# EAGLE board board_rev3 (EAGLE 4.16)
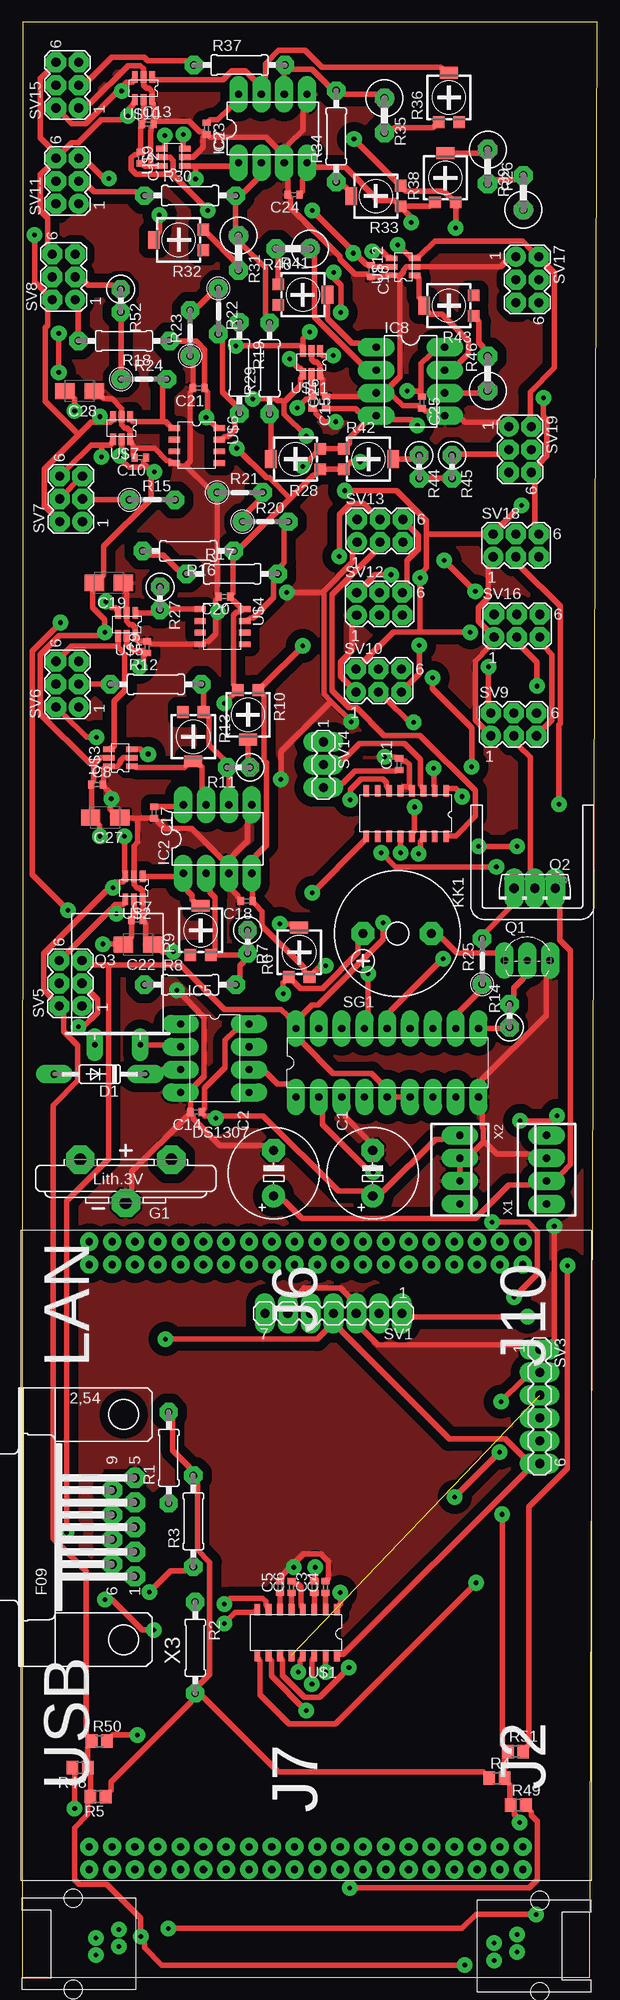
[diagram p0: board, top side]
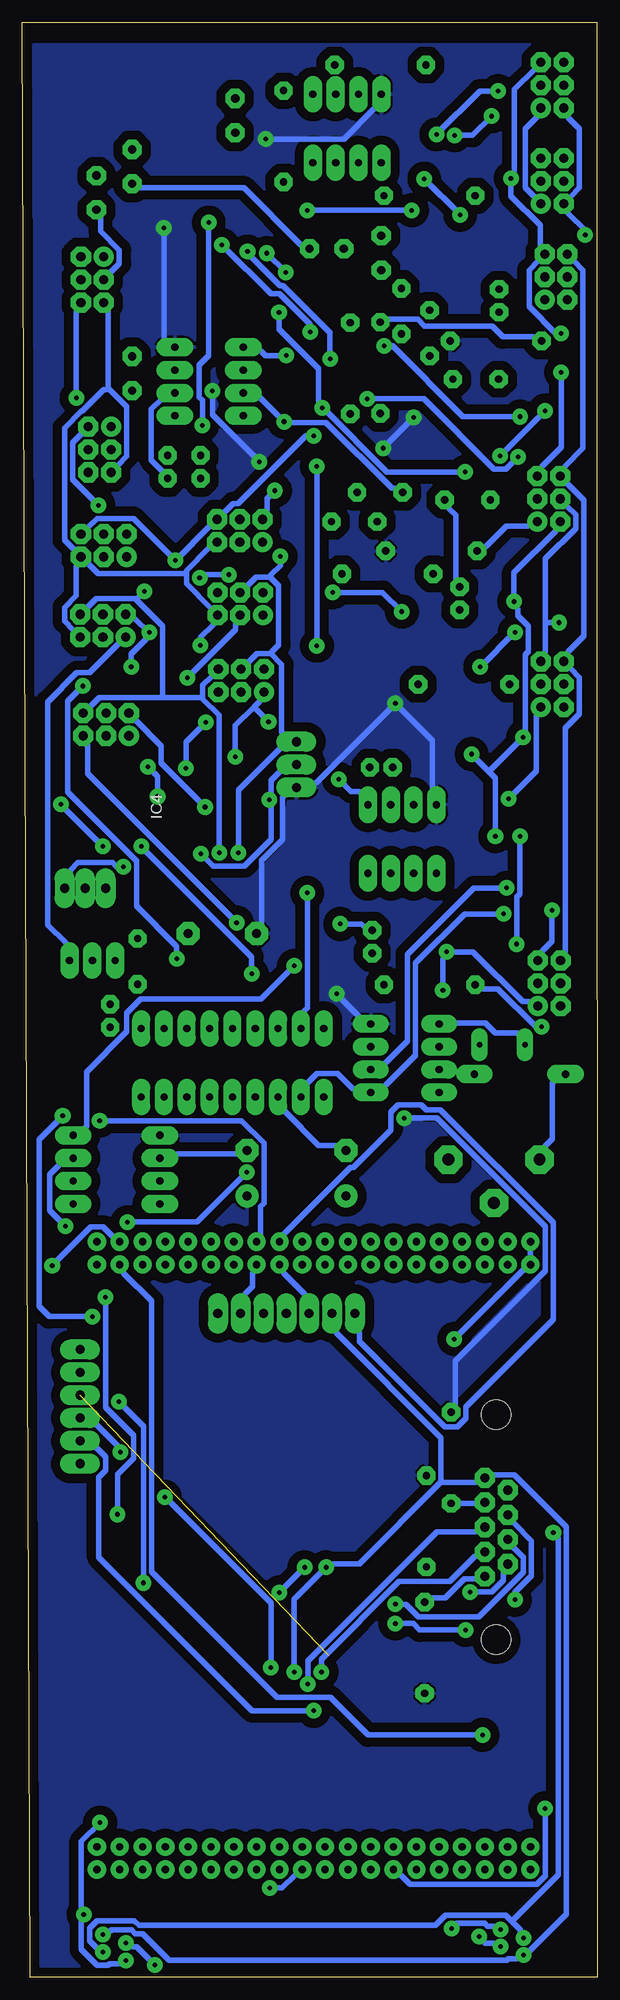
[diagram p1: board, bottom side, seen from below]

Size 63.99 x 217.45 mm. Coordinates in mm from the lower left corner, seen from the top.
Outline: 0,0 63.12,0 63.99,217.45 0.05,217.45 0,0
Copper layers (1*16): Top 0.035mm / dielectric 1.5mm / Bottom 0.035mm
Design rules "mio2": minimum track width 20mil, minimum drill 20mil, track to track 40mil, track to pad 40mil, pad to pad 40mil, via to via 40mil, smd to smd 40mil, copper to edge 40mil, drill to drill 8mil, minimum pad ring 24mil, minimum via ring 24mil, stop-mask expansion 4mil, vias tented up to drill 0mil, thermal gap 10mil
Net classes: 0 default: width 0.61 mm
tKeepout: area 26.5,90.6 to 29.4,93.5; area 26.5,85.4 to 29.4,88.2; area 37.5,90.6 to 40.4,93.5; area 37.5,85.4 to 40.4,88.2
tRestrict: area 9.1,43.5 to 13.5,56.5; area 25.3,36.2 to 35.5,40.2; area 6.2,0.4 to 12.3,6.9; area 50.1,0 to 57,6.1

## Footprints (pad centres in the part's own frame; a part is rotated, then mirrored left to right if it is on the bottom)
E5-10,5 = drill 1.016 pad 2.54 round: + -2.54,0 | drill 1.016 pad 2.54 octagon: - 2.54,0
C0402 = smd 0.7 x 0.9: 1 -0.65,0; 2 0.65,0
B/3528-21W = smd 2.15 x 1.8: + 1.625,0; - -1.625,0
DO35-10 = drill 0.813 long: A 5.08,0; C -5.08,0
CR2032V = drill 1.321 pad 3.15 octagon: + -2.54,-5.08; +@1 -2.54,5.08; - 2.286,0
FOX = drill 0.8 pad 1.93 round: J6.1 67.31,0; J6.2 69.85,0; J6.3 67.31,-2.54; J6.4 69.85,-2.54; J6.5 67.31,-5.08; J6.6 69.85,-5.08; J6.7 67.31,-7.62; J6.8 69.85,-7.62; J6.9 67.31,-10.16; J6.10 69.85,-10.16; J6.11 67.31,-12.7; J6.12 69.85,-12.7; J6.13 67.31,-15.24; J6.14 69.85,-15.24; J6.15 67.31,-17.78; J6.16 69.85,-17.78; J6.17 67.31,-20.32; J6.18 69.85,-20.32; J6.19 67.31,-22.86; J6.20 69.85,-22.86; J6.21 67.31,-25.4; J6.22 69.85,-25.4; J6.23 67.31,-27.94; J6.24 69.85,-27.94; J6.25 67.31,-30.48; J6.26 69.85,-30.48; J6.27 67.31,-33.02; J6.28 69.85,-33.02; J6.29 67.31,-35.56; J6.30 69.85,-35.56; J6.31 67.31,-38.1; J6.32 69.85,-38.1; J6.33 67.31,-40.64; J6.34 69.85,-40.64; J6.35 67.31,-43.18; J6.36 69.85,-43.18; J6.37 67.31,-45.72; J6.38 69.85,-45.72; J6.39 67.31,-48.26; J6.40 69.85,-48.26; J7.1 0,0; J7.2 2.54,0; J7.3 0,-2.54; J7.4 2.54,-2.54; J7.5 0,-5.08; J7.6 2.54,-5.08; J7.7 0,-7.62; J7.8 2.54,-7.62; J7.9 0,-10.16; J7.10 2.54,-10.16; J7.11 0,-12.7; J7.12 2.54,-12.7; J7.13 0,-15.24; J7.14 2.54,-15.24; J7.15 0,-17.78; J7.16 2.54,-17.78; J7.17 0,-20.32; J7.18 2.54,-20.32; J7.19 0,-22.86; J7.20 2.54,-22.86; J7.21 0,-25.4; J7.22 2.54,-25.4; J7.23 0,-27.94; J7.24 2.54,-27.94; J7.25 0,-30.48; J7.26 2.54,-30.48; J7.27 0,-33.02; J7.28 2.54,-33.02; J7.29 0,-35.56; J7.30 2.54,-35.56; J7.31 0,-38.1; J7.32 2.54,-38.1; J7.33 0,-40.64; J7.34 2.54,-40.64; J7.35 0,-43.18; J7.36 2.54,-43.18; J7.37 0,-45.72; J7.38 2.54,-45.72; J7.39 0,-48.26; J7.40 2.54,-48.26
DIL08 = drill 0.813 long: 1 -3.81,-3.81; 2 -1.27,-3.81; 3 1.27,-3.81; 4 3.81,-3.81; 5 3.81,3.81; 6 1.27,3.81; 7 -1.27,3.81; 8 -3.81,3.81
ADT7318SMD = smd 0.635 x 1.27: 1 -10.16,-1.27; 2 -8.89,-1.27; 3 -7.62,-1.27; 4 -6.35,-1.27; 5 -5.08,-1.27; 6 -3.81,-1.27; 7 -2.54,-1.27; 8 -1.27,-1.27; 9 -1.27,3.81; 10 -2.54,3.81; 11 -3.81,3.81; 12 -5.08,3.81; 13 -6.35,3.81; 14 -7.62,3.81; 15 -8.89,3.81; 16 -10.16,3.81
DS1307 = drill 0.8 long: 1 -8.89,-5.08; 2 -6.35,-5.08; 3 -3.81,-5.08; 4 -1.27,-5.08; 5 -1.27,2.54; 6 -3.81,2.54; 7 -6.35,2.54; 8 -8.89,2.54
TO92-EBC = drill 0.813 long: B 0,-1.27; C -2.54,-1.27; E 2.54,-1.27
TO126AV = drill 1.016 long: B 2.286,-1.27; C 0,-1.27; E -2.286,-1.27
Q = drill 0.61 long: 1 -2.54,-7.62; 2 2.54,-7.62
0207/10 = drill 0.813 octagon: 1 -5.08,0; 2 5.08,0
R0805 = smd 1.3 x 1.5: 1 -0.85,0; 2 0.85,0
RTRIM4G/J = smd 1.3 x 1.3: 1 -1.15,-2.75; 3 1.15,-2.75 | smd 2 x 1.3: 2 0,2.75
0309V = drill 0.813 octagon: 1 -1.27,0; 2 1.27,0
0207/5V = drill 0.813 octagon: 1 -2.54,0; 2 2.54,0
0411V = drill 0.914 octagon: 1 -2.54,0; 2 1.27,0
F/CM12P = drill 1.016 pad 2.54 octagon: + 3.81,0; - -3.81,0
MA07-1 = drill 1.016 long: 1 -7.62,0; 2 -5.08,0; 3 -2.54,0; 4 0,0; 5 2.54,0; 6 5.08,0; 7 7.62,0
MA06-1 = drill 1.016 long: 1 -6.35,0; 2 -3.81,0; 3 -1.27,0; 4 1.27,0; 5 3.81,0; 6 6.35,0
MA03-2 = drill 1.016 round: 1 -2.54,-1.27 | drill 1.016 octagon: 2 -2.54,1.27; 3 0,-1.27; 4 0,1.27; 5 2.54,-1.27; 6 2.54,1.27
MA03-1 = drill 1.016 long: 1 -2.54,0; 2 0,0; 3 2.54,0
MAX3232 = smd 0.635 x 1.27: 1 0,-2.54; 2 1.27,-2.54; 3 2.54,-2.54; 4 3.81,-2.54; 5 5.08,-2.54; 6 6.35,-2.54; 7 7.62,-2.54; 8 8.89,-2.54; 9 8.89,2.54; 10 7.62,2.54; 11 6.35,2.54; 12 5.08,2.54; 13 3.81,2.54; 14 2.54,2.54; 15 1.27,2.54; 16 0,2.54
MCP3421 = smd 0.635 x 1.27: 1 -0.953,-1.27; 2 0,-1.27; 3 0.953,-1.27; 4 0.953,1.27; 5 0,1.27; 6 -0.953,1.27
MAX6032 = smd 0.66 x 1.27: P$1 0.3,0.6; P$2 1.6,0.6; P$3 2.9,0.6; P$4 4.2,0.6; P$5 4.2,5.57; P$6 2.9,5.57; P$7 1.6,5.57; P$8 0.3,5.57
MCP23008_DHT = drill 0.8 long: P$1 0,0; P$2 2.54,0; P$3 5.08,0; P$4 7.62,0; P$5 10.16,0; P$6 12.7,0; P$7 15.24,0; P$8 17.78,0; P$9 20.32,0; P$10 20.32,7.62; P$11 17.78,7.62; P$12 15.24,7.62; P$13 12.7,7.62; P$14 10.16,7.62; P$15 7.62,7.62; P$16 5.08,7.62; P$17 2.54,7.62; P$18 0,7.62
J-I2C = drill 0.5 pad 1.27 round: 1 -2.54,-0.635; 2 0,0.318; 3 -2.54,1.27; 4 0,2.223
22-23-2041 = drill 0.813 long: 1 -3.81,0; 2 -1.27,0; 3 1.27,0; 4 3.81,0
F09H = drill 1.016 octagon: 1 -5.486,-1.27; 2 -2.743,-1.27; 3 0,-1.27; 4 2.743,-1.27; 5 5.486,-1.27; 6 -4.115,1.27; 7 -1.372,1.27; 8 1.372,1.27; 9 4.115,1.27 | hole 3.302: -12.522,0; 12.522,0

## Placement (x,y rotation side)
C1  470uF  [E5-10,5]  38.98,89.42 90 top
C2  470uF  [E5-10,5]  27.96,89.42 90 top
C3  100nF  [C0402]  32.48,43.4 90 top
C4  100nF  [C0402]  33.75,43.4 90 top
C5  100nF  [C0402]  28.67,43.4 90 top
C6  100nF  [C0402]  29.94,43.4 90 top
C7  100nF  [C0402]  12.77,117.61 0 top
C8  100nF  [C0402]  8.3,132.65 0 top
C9  100nF  [C0402]  13.89,147.94 90 top
C10  100nF  [C0402]  13.13,169.02 180 top
C11  100nF  [C0402]  41.93,134.94 90 top
C12  100nF  [C0402]  13.18,202.4 270 top
C13  100nF  [C0402]  13.94,206.11 0 top
C14  100nF  [C0402]  19.32,96.23 180 top
C15  100nF  [C0402]  32.28,175.17 270 top
C16  100nF  [C0402]  38.78,189.8 270 top
C17  100nF  [C0402]  14.65,129.55 270 top
C18  100nF  [C0402]  24.96,119.7 180 top
C19  [B/3528-21W]  9.62,155.11 180 top
C20  100nF  [C0402]  22.47,153.58 180 top
C21  100nF  [C0402]  19.63,176.75 180 top
C22  [B/3528-21W]  12.87,114.87 180 top
C23  100nF  [C0402]  20.49,205.65 270 top
C24  100nF  [C0402]  30.2,198.29 180 top
C25  100nF  [C0402]  44.47,175.17 270 top
C26  100nF  [C0402]  33.8,175.17 90 top
C27  [B/3528-21W]  9.22,128.99 180 top
C28  [B/3528-21W]  6.37,176.44 180 top
D1  1N4148  [DO35-10]  8.61,100.44 180 top
G1  CR2032V  [CR2032V]  11.5,88.4 270 top
IC1  FOX  [FOX]  7.44,11.95 90 top
IC2  MAX412CPA  [DIL08]  21.71,126.61 0 top
IC4  ADT7316SMD  [ADT7318SMD]  37,130.72 180 top
IC5  DS1307  [DS1307]  22.68,97.14 270 top
IC7  MAX412CPA  [DIL08]  27.86,205.65 0 top
IC8  MAX412CPA  [DIL08]  43.2,177.51 270 top
KK1  D01S  [D01S]  56.76,118.94 0 top
Q1  BC548  [TO92-EBC]  56.21,114.36 0 top
Q2  BD438  [TO126AV]  57.02,119.85 180 top
Q3  32,768Khz  [Q]  10.59,111.32 0 top
R1  2k2  [0207/10]  16.28,57.77 90 top
R2  2k2  [0207/10]  19.22,36.64 270 top
R3  2k2  [0207/10]  19.02,50.71 90 top
R4  [R0805]  52.8,22.11 0 top
R5  [R0805]  8.4,20.08 180 top
R6  [RTRIM4G/J]  30.81,114.01 0 top
R7  [0309V]  25.06,115.18 270 top
R8  [0207/10]  18.66,110.4 0 top
R9  [RTRIM4G/J]  19.83,116.45 0 top
R10  [RTRIM4G/J]  25.12,140.42 180 top
R11  [0309V]  24.05,134.58 180 top
R12  [0207/10]  14.85,143.83 0 top
R13  [RTRIM4G/J]  19.02,137.99 180 top
R14  [0309V]  54.22,106.95 90 top
R15  [0207/5V]  14.45,164.35 0 top
R16  5k 1%  [0207/10]  18.46,158.66 180 top
R17  2k2  [0207/10]  23.34,156.12 0 top
R18  5k 1%  [0207/10]  11.3,182.03 180 top
R19  100k 1%  [0207/10]  24.15,179.03 270 top
R20  [0207/5V]  27.05,161.91 0 top
R21  [0207/5V]  24.2,165.16 0 top
R22  [0207/5V]  21.81,185.33 270 top
R23  [0207/5V]  18.66,182.89 90 top
R24  [0207/5V]  13.53,177.76 0 top
R25  [0207/5V]  51.18,112.99 90 top
R26  10k  [0411V]  55.75,199.15 90 top
R27  [0309V]  15.31,153.38 270 top
R28  [RTRIM4G/J]  30.4,168.87 90 top
R29  10k  [0207/10]  27.5,178.98 90 top
R30  10k  [0207/10]  18.66,198.18 0 top
R31  10k  [0411V]  24.05,191.17 270 top
R32  [RTRIM4G/J]  17.39,193.26 90 top
R33  [RTRIM4G/J]  39.34,198.13 90 top
R34  10k  [0207/10]  34.92,204.79 90 top
R35  10k  [0411V]  40.3,206.46 270 top
R36  [RTRIM4G/J]  47.47,209.11 0 top
R37  10k  [0207/10]  24.15,212.71 0 top
R38  [RTRIM4G/J]  47.06,200.16 0 top
R39  10k  [0411V]  51.79,200.77 270 top
R40  10k  [0411V]  29.48,192.29 180 top
R41  [RTRIM4G/J]  31.21,187.16 270 top
R42  [RTRIM4G/J]  38.53,168.87 270 top
R43  [RTRIM4G/J]  47.47,185.94 90 top
R44  [0309V]  44.17,168.01 270 top
R45  [0309V]  47.82,168.01 270 top
R46  10k  [0411V]  51.79,179.03 90 top
R48  [R0805]  6.42,23.28 180 top
R49  [R0805]  55.19,19.11 0 top
R50  [R0805]  8.55,26.23 0 top
R51  [R0805]  54.88,25.11 0 top
R52  [0309V]  10.94,186.5 270 top
SG1  F/CM12P  [F/CM12P]  41.73,116.09 180 top
SV1  [MA07-1]  34.62,73.83 180 top
SV3  [MA06-1]  57.58,63.46 270 top
SV5  [MA03-2]  5.35,110.55 90 top
SV6  [MA03-2]  5,143.83 90 top
SV7  [MA03-2]  5.41,164.45 90 top
SV8  [MA03-2]  4.59,189.14 90 top
SV9  [MA03-2]  54.68,139.36 0 top
SV10  [MA03-2]  39.64,144.23 0 top
SV11  [MA03-2]  5,199.81 90 top
SV12  [MA03-2]  39.75,152.77 0 top
SV13  [MA03-2]  39.8,160.9 0 top
SV14  [MA03-1]  33.5,134.89 270 top
SV15  [MA03-2]  5,210.48 90 top
SV16  [MA03-2]  55.04,150.33 0 top
SV17  [MA03-2]  56.21,188.84 270 top
SV18  [MA03-2]  54.94,159.27 0 top
SV19  [MA03-2]  55.39,169.94 270 top
U$1  MAX3232  [MAX3232]  35.02,38.32 180 top
U$2  MCP3421  [MCP3421]  12.42,121.17 180 top
U$3  MCP3421  [MCP3421]  10.89,135.65 90 top
U$4  MAX6032  [MAX6032]  19.17,152.46 270 top
U$5  MCP3421  [MCP3421]  11.6,150.48 180 top
U$6  MAX6032  [MAX6032]  16.33,172.63 270 top
U$7  MCP3421  [MCP3421]  11.04,172.33 180 top
U$8  MCP23008_DHT  [MCP23008_DHT]  30.45,97.9 0 top
U$9  MCP3421  [MCP3421]  16.78,202.45 90 top
U$10  MCP3421  [MCP3421]  13.48,210.12 180 top
U$11  MCP3421  [MCP3421]  32.18,179.64 180 top
U$12  MCP3421  [MCP3421]  42.39,190.26 90 top
U$13  J-I2C  [J-I2C]  52.5,4.08 180 top
U$14  J-I2C  [J-I2C]  10.74,3.06 0 top
X1  22-23-2041  [22-23-2041]  58.34,89.83 90 top
X2  22-23-2041  [22-23-2041]  48.69,89.83 270 top
X3  [F09H]  11.25,50.05 90 top

## Library data of the parts
C1-C28 R1-R46 R48-R52 = rcl
D1 = diode
G1 = battery
IC1 IC4 IC5 U$1-U$14 = aggiunte
IC2 IC7 IC8 = maxim
KK1 = heatsink
Q1 = transistor-npn
Q2 = transistor-power
Q3 = special
SG1 = buzzer
SV1 SV3 SV5-SV19 = con-lstb
X1 X2 = con-molex
X3 = con-subd

## Nets
5V: SV5.5 SV6.5 SV7.4 SV7.5 SV8.5 SV9.5 SV10.5 SV11.5 SV12.5 SV13.5 SV15.5 SV16.5 SV17.5 SV18.5 SV19.5 U$8.P$5 U$8.P$6 U$8.P$18 U$13.3 U$14.3
+3V3: IC1.J6.1 IC1.J6.2 SV1.4 SV3.6 U$1.16
+5V: C1.+ C11.1 C14.1 C17.1 C20.1 C21.1 C23.1 C25.1 IC2.8 IC5.8 IC7.8 IC8.8 R1.2 R2.2 R3.2 R4.1 R5.1 R6.1 R10.3 R16.1 R18.1 R28.1 R33.3 R38.3 R42.3 SG1.+ SV14.3 U$4.P$8 U$6.P$8 X2.1
+12V: C2.+ Q2.E SV10.4 SV12.4 SV13.4 SV14.1 X1.2
CH0: IC8.7 R43.2 U$12.1
CH1: IC8.1 R41.2 U$11.1
CH2: IC7.7 R36.2 U$10.1
CH3: IC7.1 R32.2 U$9.1
GND: C1.- C2.- C4.2 C5.2 C7.2 C8.2 C9.2 C10.2 C11.2 C12.2 C13.2 C14.2 C15.2 C16.2 C17.2 C18.2 C19.- C20.2 C21.2 C22.- C23.2 C24.2 C25.2 C26.2 C27.- C28.- G1.- IC2.3 IC2.5 IC4.4 IC4.5 IC5.4 IC7.3 IC7.5 IC8.3 IC8.5 Q1.E R21.1 R23.1 SV1.3 SV1.6 SV3.1 SV5.1 SV6.1 SV9.1 SV10.1 SV11.1 SV12.1 SV13.1 SV15.1 SV16.1 SV17.1 SV18.1 SV19.1 U$1.15 U$2.2 U$2.6 U$3.2 U$3.6 U$4.P$4 U$5.2 U$5.6 U$6.P$4 U$7.2 U$7.6 U$8.P$3 U$8.P$9 U$9.2 U$9.6 U$10.2 U$10.6 U$11.2 U$11.6 U$12.2 U$12.6 U$13.1 U$14.1 X1.3 X2.2 X2.3 X3.5
N$1: R14.1 U$8.P$10
N$2: R17.2 R20.2 U$4.P$7
N$3: R19.2 R22.2 U$6.P$7
N$4: D1.C IC5.3
N$5: R24.1 R52.2
N$6: R15.2 R27.1
N$7: SV8.4
N$8: R20.1 R21.2
N$9: IC2.1 R9.2 U$2.1
N$10: IC2.7 R13.2 U$3.1
N$11: SV18.3 U$8.P$15
N$12: D1.A G1.+
N$13: R27.2 U$4.P$1 U$5.1
N$14: Q2.B R25.2
N$15: IC1.J7.13 R48.2
N$16: R25.1 U$8.P$11
N$17: IC4.16 SV13.3
N$18: SV16.3 U$8.P$14
N$19: Q2.C SV9.3
N$20: Q1.C SG1.-
N$21: IC4.3 IC4.6 IC4.14 SV14.2
N$22: R24.2 U$6.P$1 U$7.1
N$23: IC4.2 SV10.3
N$25: IC4.9 U$8.P$17
N$26: Q1.B R14.2
N$27: C3.2 U$1.1
N$28: R18.2 R19.1 SV8.1
N$29: R16.2 R17.1 SV7.1
N$30: R35.2 R36.1
N$31: R10.2 R11.1
N$33: R40.2 R41.1
N$34: R43.1 R46.2
N$35: R31.2 R32.3
N$36: U$1.14 X3.3
N$37: R15.1 SV7.3
N$38: R52.1 SV8.3
N$39: C6.2 U$1.4
N$40: U$1.13 X3.2
N$41: C5.1 U$1.6
N$42: C3.1 U$1.3
N$43: C4.1 U$1.2
N$44: C6.1 U$1.5
N$45: U$1.8 X3.8
N$46: U$1.7 X3.7
N$47: R2.1 X3.1
N$48: R1.1 X3.4
N$49: R3.1 X3.6
N$50: IC4.1 SV12.3
N$53: IC1.J7.21 R49.2
N$54: IC1.J6.38 R51.2
N$55: SV3.4 U$1.11
N$56: SV3.3 U$1.12
N$57: SV3.5 U$1.10
N$58: IC2.2 R7.2 R8.2 R9.3
N$59: SV3.2 U$1.9
N$60: R8.1 SV5.3
N$61: IC1.J6.37 R50.2
N$62: R6.2 R7.1
N$63: IC2.6 R11.2 R12.2 R13.1
N$66: R22.1 R23.2
N$69: R12.1 SV6.3
N$83: IC5.1 Q3.1
N$84: IC5.2 Q3.2
N$113: IC7.2 R29.2 R30.2 R31.1
N$114: IC7.6 R34.2 R35.1 R37.2
N$115: IC8.2 R26.2 R39.2 R40.1
N$116: IC8.6 R44.2 R45.2 R46.1
N$117: R45.1 SV19.3
N$119: R26.1 SV17.3
N$121: R42.2 R44.1
N$122: R38.2 R39.1
N$123: R33.2 R34.1
N$124: R37.1 SV15.3
N$125: R30.1 SV11.3
N$126: R28.2 R29.1
SCL: IC4.13 IC5.6 R5.2 R48.1 R50.1 SV5.2 SV6.2 SV7.2 SV8.2 SV9.2 SV10.2 SV11.2 SV12.2 SV13.2 SV15.2 SV16.2 SV17.2 SV18.2 SV19.2 U$2.3 U$3.3 U$5.3 U$7.3 U$8.P$1 U$9.3 U$10.3 U$11.3 U$12.3 U$13.2 U$14.2
SD1: IC1.J6.26 SV1.1
SD2: IC1.J6.25 SV1.2
SD5: IC1.J6.23 SV1.5
SD7: IC1.J6.24 SV1.7
SDA: IC4.12 IC5.5 R4.2 R49.1 R51.1 SV5.6 SV6.6 SV7.6 SV8.6 SV9.6 SV10.6 SV11.6 SV12.6 SV13.6 SV15.6 SV16.6 SV17.6 SV18.6 SV19.6 U$2.4 U$3.4 U$5.4 U$7.4 U$8.P$2 U$9.4 U$10.4 U$11.4 U$12.4 U$13.4 U$14.4
V-: C18.1 C24.1 C26.1 IC2.4 IC7.4 IC8.4 R6.3 R10.1 R28.3 R33.1 R38.1 R42.1 X1.4
VCC: C7.1 C8.1 C9.1 C10.1 C12.1 C13.1 C15.1 C16.1 C19.+ C22.+ C27.+ C28.+ U$2.5 U$3.5 U$5.5 U$7.5 U$9.5 U$10.5 U$11.5 U$12.5

## Tracks (layer width: path | path; a pad name or v marks a point on that pad's centre or on a via)
5V  (via drill 0.51)
  Top 0.61: v9.62,200.11 9.06,200.11 7.34,201.84 SV11.5 | SV7.5 5.86,166.23 4.9,165.26 SV7.4 | v4.03,178.52 v4.03,182.84 | v44.17,148.15 44.17,145 42.95,143.78 SV10.5 | SV9.5 57.98,138.9 58.95,139.86 58.95,147.13 58.09,147.99 SV16.5 | U$8.P$18 31.21,103.9 34.56,100.55 38.83,100.55 39.85,99.53 U$8.P$5 U$8.P$6 | 9.57,112.59 17.6,112.59 22.53,107.66 28.77,107.66 29.48,106.95 U$8.P$18 | 9.57,112.59 7.69,112.59 SV5.5 | v4.9,49.44 4.9,86.32 9.57,91 9.57,112.59 | v40.15,117.31 40.15,115.43 32.89,108.17 32.23,108.17 31.21,107.15 U$8.P$18 | v4.24,150.69 1.09,147.54 1.09,122.64 v5.05,118.68
  Bottom 0.61: SV15.5 7.03,212.2 9.22,210.02 9.22,200.93 v9.62,200.11 9.62,198.13 6.37,194.88 6.37,192.75 SV8.5 6.62,190.87 7.59,189.9 7.59,185.84 4.59,182.84 v4.03,182.84 | 5.76,150.69 5.76,157.8 2.41,161.15 2.41,162.67 3.37,163.64 SV7.4 | 5.76,150.69 5.76,147.43 SV6.5 | v4.03,178.52 4.03,170.19 6.17,168.06 SV7.5 | 54.43,176.75 52.4,174.71 52.4,169.18 53.36,168.21 SV19.5 | 54.43,176.75 54.43,185.23 SV17.5 | v44.17,148.15 44.17,149.06 42.79,150.43 SV12.5 43.05,152.31 45.74,155 45.74,156.12 | 45.74,156.12 45.74,156.48 43.25,158.97 SV13.5 | SV18.5 57.98,156.93 57.98,153.68 59.3,152.36 59.3,150.84 58.34,149.87 SV16.5 | 45.74,156.12 55.55,156.12 56.66,157.24 SV18.5 | 54.43,176.75 54.68,176.59 54.94,176.59 57.32,174.21 57.42,174.21 59.3,172.33 59.3,159.88 58.24,158.81 SV18.5 | 9.52,6.21 10.18,6.87 16.89,6.87 18,5.75 51.02,5.75 51.53,6.26 55.65,6.26 56.51,5.4 56.51,4.03 55.75,3.26 U$13.3 | 9.52,6.21 8.56,5.24 8.56,5.14 U$14.3 | v4.9,49.44 4.34,48.88 4.34,11.39 9.52,6.21 | v40.15,117.31 56.71,133.87 56.71,137.02 SV9.5 | v5.05,118.68 5.05,115.23 6.12,114.16 SV5.5 | v4.24,150.69 5.76,150.69
+3V3  (via drill 0.51)
  Top 0.61: U$1.16 35.33,35.88 35.68,35.88 55.9,56.1 SV3.6 55.7,57.92 53.77,59.85 47.52,59.85 35.43,71.95 SV1.4 33.8,71.95 32.84,70.98 v15.92,70.98
  Bottom 0.61: IC1.J6.2 IC1.J6.1 8.25,78.65 v15.92,70.98
+5V  (via drill 0.51)
  Top 0.61: R1.2 16.73,61.89 16.73,58.58 18.56,56.76 R3.2 19.48,54.83 19.48,47.51 20.85,46.14 20.85,33.69 19.68,32.52 R2.2 | R5.1 9.88,20.79 9.88,21.7 18.77,30.59 R2.2 | R4.1 51.33,22.82 28.47,22.82 20.19,31.1 R2.2 | X2.1 46.71,93.18 45.94,93.18 40.2,87.44 C1.+ 37.77,87.44 35.17,87.44 26.79,95.82 21.51,95.82 | IC5.8 23.59,105.27 22.58,104.25 22.58,101.21 20.29,98.92 20.29,96.63 C14.1 20.29,95.82 21.51,95.82 | v29.03,109.38 29.03,110.65 R6.1 30.3,110.65 30.96,109.99 33.4,109.99 37.36,113.96 37.36,114.87 SG1.+ | C23.1 20.9,206.62 21.71,206.62 23.08,207.99 IC7.8 | 44.37,176.44 44.37,179.49 45.39,180.5 IC8.8 | 44.37,176.44 44.37,176.14 C25.1 | v48.23,194.58 48.23,196.81 R38.3 47.57,198.03 46.91,198.69 42.69,198.69 R33.3 41.47,199.91 v36.9,204.48 | 20.59,173.49 20.59,173.34 21.31,172.63 U$6.P$8 | 20.59,173.49 20.59,176.34 C21.1 20.29,177.15 20.29,181.06 19.38,181.98 17.34,181.98 R18.1 | 29.79,164.5 24.46,159.17 R16.1 23.44,157.7 23.44,153.99 C20.1 23.44,153.17 24.15,152.46 U$4.P$8 24.15,151.85 23.85,151.85 23.49,151.5 23.49,143.78 R10.3 23.34,142.56 v22.47,141.69 | 29.79,164.5 32.38,167.09 32.53,167.09 R28.1 33.75,167.75 35.17,167.75 R42.3 36.39,168.36 36.6,168.57 v37.61,168.57 | v23.85,170.09 27.15,166.79 27.5,166.79 29.79,164.5 | v20.44,173.49 20.59,173.49 | C11.1 41.52,134.18 37,134.18 35.68,132.85 SV14.3 | C17.1 15.06,130.21 16.94,130.21 IC2.8 | v42.85,176.44 44.37,176.44 | v21.51,95.57 21.51,95.82
  Bottom 0.61: v29.03,109.38 26.64,107 IC5.8 | v48.23,194.58 48.23,182.28 IC8.8 | v36.9,204.48 28.21,204.48 24.86,207.84 IC7.8 | v23.85,170.09 v20.44,173.49 | IC2.8 18.36,132.4 18.36,137.58 v22.47,141.69 31.31,132.85 SV14.3 35.02,131.28 35.02,126.56 37.36,124.22 37.36,117.31 SG1.+ | v42.85,176.44 42.85,173.8 v37.61,168.57 | v21.51,95.57 17.85,95.57 5.81,83.53 5.81,78.55 15.82,68.54 15.82,63.82 R1.2
  pour Bottom: 0.93,1.23 62.71,1.23 62.71,215 0.93,215 0.93,214.59
+12V  (via drill 0.51)
  Top 0.61: v35.28,158.05 35.28,162.67 36.5,163.89 38.02,163.89 38.98,162.93 SV13.4 | C2.+ 29.18,86.32 31.11,84.39 50.41,84.39 54.12,88.1 56.36,88.1 X1.2 59.96,89.37 60.98,90.39 60.98,114.21 59.81,115.38 59.81,118.94 Q2.E | v39.95,125.08 41.52,123.51 v52.75,123.51
  Bottom 0.61: 36.34,147.23 35.12,146.01 35.12,138.49 SV14.1 35.38,136.61 39.95,132.04 v39.95,125.08 | 36.34,147.23 37.87,147.23 38.83,146.27 SV10.4 | 36.44,155.77 37.97,155.77 38.93,154.8 SV12.4 | 36.44,155.77 35.48,154.8 35.48,148.2 36.19,147.48 36.34,147.23 | v35.28,158.05 35.28,157.04 36.29,156.02 36.44,155.77 | v52.75,123.51 53.51,123.51 53.97,123.96 57.83,123.96 58.64,123.15 Q2.E
CH0
  Top 0.61: U$12.1 44.12,189.04 44.12,186.91 R43.2 45.33,184.98 46.71,184.98 49.65,182.03 49.65,180.61 48.64,179.59 IC8.7
CH1  (via drill 0.51)
  Top 0.61: v34.62,180.4 33.4,180.4 U$11.1 | R41.2 33.96,186.19 33.96,184.52 36.7,181.77 37.41,181.77 IC8.1
  Bottom 0.61: v34.62,180.4 36.95,180.4 37.41,180.86 IC8.1
CH2
  Top 0.61: U$10.1 14.7,211.09 22.32,211.09 23.34,212.1 24.76,212.1 25.78,211.09 IC7.7 27.05,211.44 27.05,212.86 28.52,214.34 31.47,214.34 33.35,212.46 46.5,212.46 R36.2
CH3  (via drill 0.51)
  Top 0.61: 19.27,201.49 23.08,201.49 IC7.1 | 19.27,201.49 18.66,201.49 U$9.1 | v15.26,196.05 15.26,194.22 R32.2 | v19.27,200.06 19.27,201.49
  Bottom 0.61: v15.26,196.05 v19.27,200.06
GND  (via drill 0.51)
  Top 0.61: C23.2 20.09,204.69 20.09,203.57 18.97,202.45 U$9.2 | 14.24,201.49 14.91,201.49 U$9.6 | 14.24,201.49 13.58,201.49 C12.2 | C13.2 14.6,206.51 14.6,208.24 U$10.6 14.45,209.46 14.45,209.77 14.09,210.12 13.84,210.12 13.48,210.48 U$10.2 13.48,212.31 13.13,212.66 11.76,212.66 7.54,208.44 7.34,208.44 SV15.1 | 14.24,201.49 14.24,205.4 14.3,205.45 14.3,205.7 C13.2 | C23.2 20.09,205.3 19.73,205.3 18.56,206.46 14.91,206.46 C13.2 | IC7.3 29.59,199.86 29.59,198.69 C24.2 29.84,197.88 29.84,196.86 35.33,191.38 35.33,191.12 37,189.45 38.37,189.45 C16.2 39.19,189.19 40.51,189.19 U$12.6 41.73,189.29 42.03,189.29 | IC7.5 31.21,207.48 31.21,205.45 29.59,203.82 IC7.3 | C23.2 20.9,204.69 27.1,204.69 28.32,203.47 IC7.3 | 42.03,189.29 42.39,189.65 42.39,189.9 42.74,190.26 U$12.2 53.26,190.26 53.87,190.87 SV17.1 | U$11.2 32.18,180 32.53,179.64 32.79,179.64 33.14,179.29 33.14,178.98 U$11.6 33.4,177.76 33.4,176.14 C26.2 34.21,175.83 37.41,175.83 IC8.3 | v34.87,173.04 33.6,173.04 32.69,173.95 32.69,174.21 C15.2 | IC8.3 41.37,175.78 42.34,174.82 44.06,174.82 C25.2 44.88,174.21 45.08,174.21 IC8.5 48.99,173.24 49.25,172.99 53.06,172.99 SV19.1 | 42.03,189.29 42.03,178.07 41.02,177.05 IC8.3 | v16.78,114.06 15.57,114.06 C22.- 13.74,115.73 13.74,117.21 C7.2 13.43,118.02 13.43,119.29 U$2.6 13.38,120.51 13.38,120.81 13.03,121.17 12.77,121.17 12.42,121.53 U$2.2 12.42,125.84 12.82,126.25 12.82,128.94 | C18.2 24,120.1 24,120.26 23.44,120.81 IC2.3 | IC2.5 25.07,128.43 25.07,126.4 23.44,124.78 IC2.3 | 12.82,128.94 11.91,128.94 C27.- 9.77,129.86 9.77,131.08 | 12.82,128.94 14.24,128.94 C17.2 15.06,128.59 15.87,127.77 18.82,127.77 22.17,124.42 IC2.3
  Top 0.61: U$3.2 11.25,135.65 10.89,135.29 10.89,135.04 10.54,134.68 10.23,134.68 U$3.6 9.01,134.43 9.01,133.06 C8.2 9.27,132.24 9.77,131.74 9.77,131.08 | 9.77,131.08 v9.88,131.08 | 12.31,170.09 12.31,170.4 12.26,170.45 U$7.6 12.01,171.67 12.01,171.97 11.65,172.33 11.4,172.33 11.04,172.68 U$7.2 11.04,174.51 9.98,175.58 9.06,175.58 C28.- | 12.31,170.09 12.31,169.43 C10.2 | R23.1 19.02,179.39 19.02,177.15 C21.2 18.66,176.34 18.66,168.67 18.36,168.36 18.21,168.11 | 18.21,168.11 17.55,168.11 U$6.P$4 16.33,168.72 16.07,168.72 14.7,170.09 12.31,170.09 | 18.21,168.11 20.7,165.62 R21.1 21.66,153.99 C20.2 21.51,153.17 21.51,151.9 | 43.05,132.6 43.05,134.89 42.64,135.29 42.34,135.29 C11.2 41.52,135.75 v40.31,135.75 | 43.05,132.6 IC4.4 | IC4.5 42.39,132.45 42.79,132.45 43.05,132.6 | SV12.1 36.7,150.43 36.7,147.59 35.38,146.27 35.38,144.74 36.34,143.78 SV10.1 | 21.51,151.9 21.51,149.42 20.65,148.55 20.39,148.55 U$4.P$4 19.17,148.3 14.3,148.3 C9.2 13.48,148.6 12.82,148.6 U$5.6 12.57,149.82 12.57,150.13 12.21,150.48 11.96,150.48 11.6,150.84 U$5.2 11.6,154.24 C19.- | 33.4,154.04 36.75,157.39 36.75,158.56 SV13.1 | 33.4,154.04 v29.43,154.04 | v21.76,151.9 21.51,151.9 | 34.36,141.9 33.55,142.71 33.55,153.78 33.4,154.04 | 34.36,141.9 v36.6,139.66 | v28.77,133.26 28.77,136.31 34.36,141.9 | 29.99,45.78 31.26,47.05 33.24,47.05 34.06,46.24 34.06,44.36 C4.2 | 29.99,45.78 28.88,44.67 28.88,44.36 C5.2 | v33.75,33.95 U$1.15 | v30.2,45.58 29.99,45.78 | SV1.6 30.35,75.7 31.31,76.67 35.38,76.67 36.34,75.7 SV1.3 37.97,71.95 39.59,70.32 55.39,70.32 SV3.1 59.2,70.88 v59.2,83.53 | C14.2 18.72,96.63 18.72,97.45 IC5.4 19.22,99.17 20.24,100.19 20.24,106.74 v17.19,109.79
  Top 0.61: C14.2 18.97,95.82 18.97,95.52 21.97,92.52 26.74,92.52 C2.- | G1.- 12.16,87.64 12.16,89.62 18.36,95.82 C14.2 | SV9.1 51.38,138.9 50.41,139.86 50.41,146.42 51.99,147.99 SV16.1 51.74,149.87 50.77,150.84 50.77,152.36 51.89,153.48 51.89,156.93 SV18.1 | U$8.P$3 35.94,95.92 35.94,95.67 38.43,93.18 C1.- | 51.33,92.93 51.33,94.35 51.18,94.5 51.18,95.92 U$8.P$9 51.18,99.89 58.29,107 58.29,111.11 Q1.E | 51.33,92.93 50.31,91.91 X2.2 X2.3 | X1.3 56.36,91.55 52.8,91.55 51.58,92.77 51.33,92.93
  Bottom 0.61: SV11.1 7.03,198.08 8,199.05 8,205.65 6.78,206.87 SV15.1 | IC8.3 37.51,175.68 v34.87,173.04 34.06,172.94 30.2,172.94 22.88,165.62 22.63,165.62 R21.1 | SV5.1 7.69,108.52 8.3,108.52 13.84,114.06 v16.78,114.06 17.19,113.25 v17.19,109.79 | v9.88,131.08 6.78,134.18 6.78,140.22 SV6.1 | v40.31,135.75 40.31,139.2 38.22,141.29 | 38.22,141.29 37.61,141.9 SV10.1 | v29.43,154.04 23.9,154.04 v21.76,151.9 | v36.6,139.66 38.22,141.29 | v28.77,133.26 27.4,131.89 26.49,131.89 IC2.5 | U$13.1 54.22,5.09 54.07,5.24 51.84,5.24 51.43,4.84 50.62,4.84 47.67,1.89 10.08,1.89 9.93,2.04 9.01,2.04 U$14.1 7.49,2.91 3.42,6.97 3.42,50.1 9.22,55.89 11.45,55.89 X3.5 13.58,55.03 17.39,55.03 | v33.75,33.95 33.75,42.02 v30.2,45.58 29.38,45.99 26.49,45.99 17.45,55.03 17.39,55.03 | C1.- 40.2,91.55 46.71,91.55 X2.2 | SV16.1 53.31,148.3 56.51,145.1 57.93,145.1 61.18,141.85 61.18,117.06 59.2,115.07 Q1.E | C2.- 29.18,92.52 31.01,92.52 34.77,96.28 U$8.P$3 | v59.2,83.53 60.98,85.31 60.98,89.27 59.96,90.28 X1.3 | 17.39,55.03 17.39,60.01 29.03,71.64 SV1.6
  pour Top: 0.53,0.83 62.71,0.83 62.71,216.22 0.93,216.22 0.93,215.4 0.53,215.4
N$1
  Top 0.61: U$8.P$10 53.26,105.52 R14.1
N$2
  Top 0.61: U$4.P$7 25.37,151.19 25.67,151.19 27.96,153.48 27.96,155.16 R17.2 28.88,157.09 29.13,157.34 29.13,160.95 R20.2
N$3
  Top 0.61: U$6.P$7 22.53,171.36 22.83,171.36 23.69,172.22 23.69,172.99 R19.2 23.69,174.92 22.27,176.34 22.27,181.83 R22.2
N$4
  Top 0.61: IC5.3 15.62,100.95 D1.C
N$5
  Top 0.61: R24.1 10.99,184.26 R52.2
N$6
  Bottom 0.61: R27.1 15.77,155.61 15.77,162.62 16.53,163.39 R15.2
N$8
  Top 0.61: R20.1 24.96,162.88 26.28,164.2 R21.2
N$9
  Top 0.61: U$2.1 16.94,122.44 IC2.1 18.36,120.81 18.87,120.31 18.87,119.8 R9.2
N$10
  Top 0.61: U$3.1 12.77,134.58 18,134.58 18.05,134.63 R13.2 19.99,134.63 19.99,132.4 IC2.7
N$11  (via drill 0.51)
  Top 0.61: v38.48,111.62 38.48,107.51 U$8.P$15 | v50.77,125.79 v55.04,125.79 | v59.71,130.47 59.71,139.31 59.86,139.46 59.86,152.51 55.44,156.93 SV18.3
  Bottom 0.61: v38.48,111.62 38.48,113.5 v50.77,125.79 | v55.04,125.79 v59.71,130.47
N$12
  Bottom 0.61: D1.A 5,99.48 5,93.23 5.76,92.47 G1.+
N$13
  Top 0.61: U$5.1 14.35,151.75 R27.2 16.28,152.16 19.17,152.16 U$4.P$1
N$14
  Top 0.61: R25.2 51.74,116.4 51.74,116.45 54.22,118.94 Q2.B
N$15  (via drill 0.51)
  Top 0.61: v5.81,18.76 5.81,22.57 R48.2
  Bottom 0.61: v5.81,18.76 5.81,11.24 6.73,10.32 20.85,10.32 21.86,11.34 IC1.J7.13
N$16
  Top 0.61: U$8.P$11 48.69,107.45 50.72,109.49 R25.1
N$17
  Top 0.61: IC4.16 47.47,126.96 48.23,126.96 50.41,129.15 50.41,131.99 44.27,138.14 40.25,138.14 37.16,141.24 36.34,141.24 34.46,143.12 34.46,153.78 39.24,158.56 39.24,158.61 SV13.3
N$18  (via drill 0.51)
  Top 0.61: v46.81,113.3 41.02,107.51 U$8.P$14 | v57.27,143.62 57.27,146.27 55.55,147.99 SV16.3
  Bottom 0.61: v46.81,113.3 46.81,114.67 51.28,119.14 51.28,124.17 58.95,131.84 58.95,141.95 v57.27,143.62
N$19
  Top 0.61: Q2.C 56.51,123.3 56.51,135.7 55.19,137.02 SV9.3
N$20
  Top 0.61: Q1.C 52.7,113.91 48.38,113.91 46.76,115.53 SG1.-
N$21  (via drill 0.51)
  Top 0.61: v44.12,124.98 44.32,125.18 44.32,126.3 IC4.14 | v36.5,130.97 36.5,132.09 37.66,133.26 40.15,133.26 40.51,132.91 40.51,132.6 IC4.6 | IC4.3 44.32,132.6 44.32,135.45 42.54,137.22 37.51,137.22 35.68,135.39 SV14.2
  Bottom 0.61: v44.12,124.98 42.74,123.61 39.29,123.61 36.34,126.56 36.34,130.97 | 36.34,130.97 36.34,133.11 35.38,134.07 SV14.2 | 36.34,130.97 v36.5,130.97
N$22
  Top 0.61: 15.62,173.04 15.92,173.04 16.33,172.63 U$6.P$1 | 15.62,173.04 12.26,173.04 U$7.1 | 15.62,173.04 15.62,176.8 R24.2
N$23  (via drill 0.51)
  Top 0.61: v45.79,134.48 45.79,132.6 IC4.2 | v43.56,139.61 43.05,139.61 40.46,142.2 SV10.3
  Bottom 0.61: v45.79,134.48 45.79,137.38 v43.56,139.61
N$25  (via drill 0.51)
  Top 0.61: v32.28,120.61 37.97,126.3 IC4.9
  Bottom 0.61: v32.28,120.61 32.28,107.81 32.58,107.51 U$8.P$17
N$26
  Top 0.61: R14.2 54.68,109.18 54.68,110.05 55.75,111.11 Q1.B
N$27  (via drill 0.51)
  Top 0.61: v32.58,45.58 32.58,44.36 C3.2 | v35.38,42.79 35.38,41.52 35.33,41.47 U$1.1
  Bottom 0.61: v35.38,42.79 v32.58,45.58
N$28
  Top 0.61: R18.2 6.22,185.53 SV8.1
  Bottom 0.61: R19.1 23.19,184.42 19.99,184.42 19.22,183.65 11.7,183.65 10.54,182.49 7.18,182.49 R18.2
N$29
  Top 0.61: R16.2 14.35,158.2 15.67,158.2 17.29,156.58 R17.1
  Bottom 0.61: SV7.1 7.74,161.4 10.13,161.4 12.42,159.12 R16.2
N$30
  Top 0.61: R36.1 45.69,205.75 41.42,205.75 41.32,205.65 R35.2
N$31
  Top 0.61: R10.2 25.12,135.55 R11.1
N$33
  Top 0.61: R41.1 28.47,188.94 28.47,191.27 R40.2
N$34
  Top 0.61: R43.1 50.82,184.16 50.82,181.83 51.33,181.32 R46.2
N$35
  Top 0.61: R32.3 20.75,193.76 23.59,190.92 R31.2
N$36  (via drill 0.51)
  Top 0.61: v32.23,32.58 32.23,35.17 U$1.14
  Bottom 0.61: v32.23,32.58 32.23,35.17 17.85,49.54 13.58,49.54 X3.3
N$37
  Top 0.61: R15.1 7.74,164.35 SV7.3
N$38
  Top 0.61: R52.1 9.98,188.23 7.34,188.23 6.93,188.63 SV8.3
N$39
  Top 0.61: C6.2 30.35,43.75 30.65,43.75 31.01,43.4 31.01,41.47 U$1.4
N$40  (via drill 0.51)
  Top 0.61: v30.7,33.95 30.91,34.15 30.91,35.17 U$1.13
  Bottom 0.61: v30.7,33.95 30.7,35.37 22.07,44.01 16.43,44.01 13.58,46.85 X3.2
N$41
  Top 0.61: U$1.6 C5.1
N$42
  Top 0.61: U$1.3 C3.1
N$43
  Top 0.61: U$1.2 C4.1
N$44
  Top 0.61: U$1.5 C6.1
N$45  (via drill 0.51)
  Top 0.61: v22.47,39.33 23.69,40.55 25.83,40.55 U$1.8 | v14.65,38.62 13.33,38.62 9.98,41.97 v9.16,41.97
  Bottom 0.61: v22.47,39.33 20.49,39.33 19.78,38.62 v14.65,38.62 | v9.16,41.97 9.16,42.79 7.34,44.61 7.34,48.53 9.32,50.51 X3.8
N$46  (via drill 0.51)
  Top 0.61: v22.47,41.47 23.13,42.13 26.74,42.13 27.1,41.77 27.1,41.47 U$1.7
  Bottom 0.61: v22.47,41.47 21.31,41.47 19.93,40.09 13.18,40.09 8.25,45.02 8.25,46.7 9.32,47.76 X3.7
N$47
  Bottom 0.61: R2.1 18.26,42.18 16.94,42.18 14.8,44.31 13.58,44.31 X3.1
N$48
  Bottom 0.61: R1.1 13.58,52.69 X3.4
N$49  (via drill 0.51)
  Top 0.61: v14.14,42.84 16.48,45.17 18.05,45.17 R3.1
  Bottom 0.61: v14.14,42.84 11.76,42.84 10.49,44.11 10.49,44.87 X3.6
N$50  (via drill 0.51)
  Top 0.61: v48.94,131.33 48.94,131.48 48.23,132.19 47.47,132.19 IC4.1 | v50.01,134.63 50.01,138.95 45.64,143.32 v45.64,144.54
  Bottom 0.61: v48.94,131.33 48.94,133.57 v50.01,134.63 | v45.64,144.54 40.25,149.92 40.25,150.43 SV12.3
N$53  (via drill 0.51)
  Top 0.61: v36.44,9.92 56.41,9.92 57.32,10.83 57.32,17.34 56.66,18 56.66,18.4 R49.2
  Bottom 0.61: v36.44,9.92 35.07,9.92 33.65,11.34 IC1.J7.21
N$54  (via drill 0.51)
  Top 0.61: v60.68,79.16 60.68,56.6 56.36,52.29 56.36,25.82 R51.2
  Bottom 0.61: v60.68,79.16 56.41,83.43 54.99,83.43 53.97,82.41 IC1.J6.38
N$55  (via drill 0.51)
  Top 0.61: v36.34,34.4 33.04,31.1 31.42,31.1 28.98,33.54 28.98,35.17 U$1.11 | v48.13,53.4 v53.11,58.38
  Bottom 0.61: v36.34,34.4 36.34,41.62 v48.13,53.4 | v53.11,58.38 53.11,58.79 55.7,61.38 SV3.4
N$56  (1 unrouted)
N$57  (via drill 0.51)
  Top 0.61: v31.57,29.63 27.71,33.49 27.71,35.17 U$1.10
  Bottom 0.61: v31.57,29.63 38.43,29.63 55.49,46.7 55.49,55.59 54.73,56.35 54.73,57.87 55.7,58.84 SV3.5
N$58
  Top 0.61: R8.2 24.2,111.37 24.2,112.53 24.61,112.94 R7.2 24.1,113.7 21.61,113.7 R9.3 21.46,114.31 21.46,120.1 20.9,120.66 20.9,120.81 IC2.2
N$59  (via drill 0.51)
  Top 0.61: v50.52,43.85 34.82,28.16 29.69,28.16 26.44,31.41 26.44,35.17 U$1.9 | v53.26,64.02 55.7,66.46 SV3.2
  Bottom 0.61: v50.52,43.85 50.52,61.28 v53.26,64.02
N$60  (via drill 0.51)
  Top 0.61: v6.22,105.73 6.83,105.73 8.35,107.25 8.35,108.78 7.39,109.74 SV5.3
  Bottom 0.61: v6.22,105.73 6.83,105.73 11.04,109.94 12.62,109.94 R8.1
N$61  (via drill 0.51)
  Top 0.61: v12.77,26.94 10.03,26.94 R50.2
  Bottom 0.61: v12.77,26.94 25.52,26.94 29.69,31.1 35.63,31.1 49.6,45.07 49.6,75.2 52.7,78.3 IC1.J6.37
N$62  (via drill 0.51)
  Top 0.61: v28.62,117.16 29.84,117.16 R6.2
  Bottom 0.61: v28.62,117.16 26.28,117.16 26.03,116.9 R7.1
N$63
  Top 0.61: R12.2 20.19,142.86 20.19,141.34 R13.1 20.8,140.12 20.8,137.07 22.32,135.55 R11.2 22.98,133.62 IC2.6
N$66
  Top 0.61: R23.2 19.63,185.89 21,187.26 R22.1
N$69
  Top 0.61: SV6.3 R12.1
N$83
  Bottom 0.61: Q3.1 8.91,105.02 11.35,105.02 12.47,106.13 15.62,106.13 IC5.1
N$84
  Top 0.61: Q3.2 15.62,103.7 IC5.2
N$113
  Top 0.61: IC7.2 26.03,199.96 24.71,198.64 R30.2 23.74,194.73 R31.1 24.51,192.7 27.05,190.16 27.05,185.03 R29.2
N$114
  Top 0.61: IC7.6 29.13,211.75 R37.2 30.2,212.25 32.23,212.25 34.06,210.43 R34.2 35.89,209.46 39.29,209.46 R35.1
N$115
  Top 0.61: R39.2 52.8,199.96 54.73,199.96 R26.2 | IC8.2 37.66,179.49 32.48,184.67 32.48,191.27 R40.1
  Bottom 0.61: R39.2 50.77,199.05 39.34,199.05 33.04,192.75 R40.1
N$116
  Top 0.61: R44.2 R45.2 | IC8.6 50.77,176.24 R46.1
  Bottom 0.61: R45.2 48.43,167.55 49.65,168.77 49.65,174.41 48.64,175.42 IC8.6
N$117
  Top 0.61: R45.1 48.79,169.43 53.06,169.43 SV19.3
N$119
  Bottom 0.61: R26.1 55.29,195.59 55.29,194.22 53.21,192.14 53.21,190.61 54.17,189.65 SV17.3
N$121
  Top 0.61: R42.2 43.2,168.87 R44.1
N$122
  Top 0.61: R38.2 48.03,202.91 50.77,202.91 R39.1
N$123
  Top 0.61: R33.2 35.99,199.1 35.94,199.1 35.83,199.2 R34.1
N$124
  Top 0.61: R37.1 18.11,213.17 13.94,213.17 13.53,213.58 9.93,213.58 7.34,210.98 SV15.3
N$125
  Top 0.61: R30.1 12.62,198.64 8,198.64 7.34,199.3 SV11.3
N$126
  Top 0.61: R28.2 27.66,169.84 27.66,172.94 R29.1
SCL  (via drill 0.51)
  Top 0.61: v31.97,183.04 31.21,182.28 31.21,181.52 U$11.3 30.96,181.47 v23.74,181.47 | v41.78,192.7 43.05,191.43 U$12.3 44.27,191.48 45.89,193.1 55.7,193.1 56.66,192.14 SV17.2 58.24,190.56 59.2,189.6 59.2,179.03 56.51,176.34 56.51,173.55 SV19.2 | v43.66,130.16 43.66,127.52 IC4.13 | 44.27,149.62 v49.86,149.62 | 44.27,149.62 41.27,149.62 37.92,146.27 SV10.2 | v41.02,156.02 39.24,156.02 38.02,154.8 SV12.2 | 44.27,149.62 v44.27,155.66 44.67,156.48 44.98,156.78 44.98,160.54 | v35.89,165.37 41.63,165.37 44.98,162.01 44.98,160.54 | 44.98,160.54 SV18.2 53.16,161.35 v55.55,163.74 | v51.89,145.76 51.89,141.69 SV9.2 | v49.25,1.33 15.51,1.33 13.58,3.26 13.58,3.67 v13.18,4.48 13.18,6.51 9.37,10.32 6.32,10.32 5.81,10.83 5.81,16.62 7.29,18.1 7.29,19.37 R5.2 7.59,20.79 7.59,22.57 R48.1 7.29,23.99 7.29,25.51 R50.1 7.08,26.94 7.08,45.12 3.42,48.78 3.42,96.99 6.17,99.73 6.17,103.64 4.59,105.22 4.59,106.95 SV5.2 3.32,108.83 2.36,109.79 2.36,113.86 9.88,121.37 | v1.34,193.81 1.34,188.63 2.56,187.41 SV8.2 2.81,185.53 2.81,183.76 2.56,183.5 2.56,175.32 6.27,171.61 | 10.84,210.02 7.03,206.21 5.51,206.21 4.54,207.17 SV15.2 | 10.84,210.02 11.6,210.78 12.26,210.78 U$10.3 | v17.9,204.99 17.9,203.67 U$9.3 | 10.84,210.02 v11.04,209.82 | 8.61,172.99 7.64,172.99 6.27,171.61 | 8.61,172.99 9.83,172.99 U$7.3 | 6.27,171.61 2.41,167.75 2.41,163.69 3.37,162.72 SV7.2 | v9.27,153.02 9.93,152.36 10.38,152.36 U$5.3 | U$8.P$1 29.48,99.33 28.42,99.33 27.2,100.55 IC5.6 | v11.35,126.91 11.35,123.05 U$2.3 11.2,121.83 10.33,121.83 9.88,121.37 | v13.99,136.05 13.64,136.05 13.08,136.61 12.77,136.61 U$3.3
  Top 0.61: v8.25,137.93 7.13,137.93 4.54,140.53 SV6.2 | 9.88,121.37 v10.08,121.17 | 8.61,172.99 v8.61,173.6
  Bottom 0.61: v31.97,183.04 31.97,183.86 35.38,187.26 36.34,187.26 v41.78,192.7 | v43.66,130.16 48.53,135.04 48.53,136.97 51.38,139.81 SV9.2 | SV16.2 51.43,151.09 49.96,149.62 v49.86,149.62 50.26,148.81 51.89,147.18 v51.89,145.76 | v41.02,156.02 43.91,156.02 v44.27,155.66 | v35.89,165.37 36.75,164.5 36.75,163.23 SV13.2 | v55.55,163.74 58.39,166.59 58.39,170.7 57.42,171.67 SV19.2 | v13.18,4.48 12.47,3.77 11.55,3.77 U$14.2 | v49.25,1.33 51.28,3.37 51.68,3.37 U$13.2 | v1.34,193.81 1.34,194.32 3.22,196.2 SV11.2 2.97,198.08 2,199.05 2,205.65 3.22,206.87 SV15.2 | v17.9,204.99 13.08,209.82 v11.04,209.82 | SV7.2 4.64,160.85 9.27,156.22 v9.27,153.02 8.86,152.21 8.86,151.45 7.69,150.28 7.69,147.43 8,147.13 8,138.75 v8.25,137.93 12.06,134.12 | v11.35,126.91 11.35,133.41 12.06,134.12 | 12.06,134.12 v13.99,136.05 | v10.08,121.17 13.74,121.17 21.15,113.75 21.15,104.15 23.59,101.71 IC5.6 | v23.74,181.47 22.83,181.47 14.96,173.6 v8.61,173.6
SD1  (via drill 0.51)
  Top 0.61: v55.39,95.26 58.95,95.26 v59.51,95.82 | v56.21,73.47 55.44,73.47 55.39,73.42 43.3,73.42 SV1.1
  Bottom 0.61: v55.39,95.26 39.59,95.26 37.1,92.77 37.1,86.07 37.46,85.71 37.46,82.77 IC1.J6.26 | v59.51,95.82 62.15,93.18 62.15,74.59 61.03,73.47 v56.21,73.47
SD2
  Bottom 0.61: IC1.J6.25 38.37,78.3 38.37,76.82 39.19,76.01 SV1.2
SD5
  Bottom 0.61: IC1.J6.23 34.87,78.35 34.87,78.3 32.58,76.01 SV1.5
SD7
  Bottom 0.61: IC1.J6.24 34.82,82.66 34.82,82.71 27.45,90.08 27.15,90.08 22.98,94.25 22.98,96.23 22.17,97.04 19.58,97.04 19.02,96.48 17.45,96.48 4.9,83.93 4.9,73.16 14.65,63.41 14.65,62.14 15.57,61.23 16.99,61.23 26.49,70.73 26.49,71.64 SV1.7
SDA  (via drill 0.51)
  Top 0.61: SV18.6 57.02,161.61 57.02,166.33 SV19.6 57.42,168.21 58.39,169.18 58.39,173.24 57.98,173.65 v57.98,175.68 | v29.74,180 30.75,178.98 30.96,178.98 U$11.4 30.96,177.76 30.96,177.05 29.13,175.22 | v38.93,191.99 40,191.99 40.51,191.48 U$12.4 | SV12.6 42.79,155.1 42.79,157.59 44.06,158.86 44.06,160.39 43.1,161.35 SV13.6 | v42.08,125.08 IC4.12 | v46.96,157.59 v50.41,154.14 | 29.13,175.22 29.13,173.9 v31.57,171.46 | v55.34,17.18 55.34,17.49 54.73,18.1 54.73,18.4 R49.1 54.28,19.82 54.28,21.4 R4.2 53.67,22.82 53.67,24.4 R51.1 53.41,25.82 v53.41,51.47 | v16.23,5.4 48.94,5.4 50.52,6.97 v57.17,6.97 | 9.88,118.83 4.9,113.86 SV5.6 | 9.88,118.83 10.33,119.29 11.2,119.29 U$2.4 | v10.43,118.27 9.88,118.83 | v15.87,204.89 15.87,203.67 U$9.4 | U$10.4 12.26,208.24 11.76,207.73 v11.76,207.02 10.94,206.62 8.76,206.62 6.22,204.08 5.51,204.08 4.54,203.11 SV11.6 | SV8.6 2.81,192.75 2.81,195.69 2,196.51 2,200.57 2.97,201.54 SV11.6 | SV15.6 2.97,212.2 2,211.24 2,204.63 3.22,203.42 SV11.6 | 8.81,170.45 7.64,170.45 4.95,167.75 SV7.6 | 8.81,170.45 9.83,170.45 U$7.4 | 10.64,147.94 11.4,147.18 11.4,143.12 10.23,141.95 10.23,136.87 U$3.4 | 10.64,147.94 10.64,148.6 U$5.4 | SV6.6 4.54,147.13 5.51,148.09 10.38,148.09 10.64,147.94 | v54.73,75.65 57.32,78.24 57.32,82.92 56.26,83.98 v52.29,83.98 | v39.04,89.52 38.73,89.52 33.4,94.86 33.4,95.92 U$8.P$2 | v25.62,175.58 28.16,175.58 28.37,175.37 28.88,175.37 29.13,175.22 | 8.81,170.45 v8.81,169.13
  Bottom 0.61: v57.98,175.68 57.98,185.23 SV17.6 | v29.74,180 29.74,182.94 34.97,188.18 35.33,188.18 38.93,191.78 v38.93,191.99 | v42.08,125.08 42.08,140.37 43.91,142.2 | 43.91,142.2 43.91,143.73 42.95,144.69 SV10.6 | 48.38,142.35 44.17,142.35 43.91,142.2 | 48.38,142.35 55.44,142.35 56.41,141.39 SV9.6 | 51.33,153.23 48.38,150.28 48.38,142.35 | 51.33,153.23 51.43,153.33 55.8,153.33 56.76,152.36 SV16.6 | v50.41,154.14 51.33,153.23 | v31.57,171.46 32.43,171.46 40,163.89 40.56,163.89 41.52,162.93 SV13.6 43.15,161.4 v46.96,157.59 51.63,162.27 55.7,162.27 56.66,161.3 SV18.6 | 57.42,6.97 57.42,15.1 v55.34,17.18 | 57.42,6.97 57.42,3.11 55.65,1.33 54.43,1.33 54.28,1.49 53.31,1.49 U$13.4 | v16.23,5.4 15.67,5.96 12.52,5.96 12.21,5.65 11.55,5.65 U$14.4 | v57.17,6.97 57.42,6.97 | U$8.P$2 32.23,99.53 31.21,100.55 28.93,100.55 27.2,98.82 IC5.5 23.59,99.17 20.24,102.53 20.24,112.79 14.75,118.27 v10.43,118.27 | v15.87,204.89 13.89,204.89 v11.76,207.02 | SV8.6 2.56,190.87 1.6,189.9 1.6,170.09 3.63,168.06 SV7.6 3.37,166.18 1.49,164.3 1.49,149.16 3.22,147.43 SV6.6 2.97,145.55 2,144.59 2,140.53 3.58,138.95 3.58,114.16 SV5.6 | v53.41,51.47 53.41,55.94 51.63,57.72 51.63,60.26 54.73,63.36 v54.73,75.65 | v52.29,83.98 44.57,83.98 v39.04,89.52 | v25.62,175.58 19.32,175.58 11.5,167.75 10.18,167.75 v8.81,169.13
V-  (via drill 0.51)
  Top 0.61: C26.1 34.21,174.51 37.05,174.51 37.41,174.15 IC8.4 | IC8.4 37.92,172.73 36.39,171.21 36.39,170.65 R42.1 35.17,170.04 33.75,170.04 R28.3 32.53,169.38 v31.21,168.06 | R33.1 42.69,197.01 45.28,197.01 R38.1 | C24.1 31.16,198.69 31.16,199.91 IC7.4 32.63,201.33 35.94,201.33 39.64,197.62 41.47,197.62 R33.1 | v43.96,172.63 43.35,173.24 41.37,173.24 IC8.4 | v43.25,195.19 43.25,195.8 42.69,196.35 R33.1 | v33.75,112.48 33.19,112.48 32.58,111.87 R6.3 31.31,111.87 31.31,112.33 26.69,116.95 26.69,118.53 25.93,119.29 C18.1 25.62,120.1 25.62,120.81 IC2.4 25.98,124.78 27.15,125.95 27.15,135.09 26.89,135.34 26.89,142.56 R10.1 26.89,143.78 v31.21,148.09
  Bottom 0.61: v43.96,172.63 43.96,175.42 44.32,175.78 44.32,179.34 43.25,180.4 v43.25,195.19 | v33.75,112.48 37.41,108.83 50.82,108.83 52.4,107.25 52.4,105.17 56.87,100.7 56.87,94.6 X1.4 | v31.21,148.09 v31.21,168.06
VCC  (via drill 0.51)
  Top 0.61: U$12.5 39.19,190.26 C16.1 38.37,190.51 38.27,190.51 36.9,191.88 | 16.53,200.67 16.43,200.57 12.67,200.57 12.11,201.13 12.11,202.4 12.47,202.76 12.77,202.76 C12.1 13.18,205.7 C13.1 13.48,206.51 U$10.5 | 16.53,200.67 16.78,200.93 16.78,202.09 16.43,202.45 U$9.5 | 36.9,191.88 32.28,196.51 v32.28,196.56 | v20.65,196.56 16.53,200.67 | U$2.5 12.42,118.02 C7.1 12.16,117.21 12.16,115.73 C22.+ 10.18,114.92 v8.96,114.92 | 7.95,134.89 8.71,135.65 U$3.5 | 7.95,134.89 7.95,133.06 C8.1 7.69,132.24 7.69,129.86 C27.+ 8.61,128.13 v8.61,126.91 | U$5.5 11.6,148.3 12.31,147.59 13.48,147.59 C9.1 13.48,146.98 13.48,146.21 v13.03,145.76 | U$11.5 32.18,176.14 C15.1 31.87,175.53 31.57,175.53 v30.6,174.56 | 13.48,168.31 13.48,168.62 C10.1 | 13.48,168.31 13.13,167.96 11.86,167.96 11.04,168.77 11.04,169.23 | 11.04,169.23 U$7.5 | 13.48,168.31 13.74,168.16 14.45,167.45 v14.7,167.45 14.3,166.64 14.3,164.4 9.06,159.17 9.06,155.97 C19.+ 7.79,154.24 7.79,152.36 9.16,150.99 v9.16,149.62 8.35,149.21 4.08,149.21 2,147.13 2,140.53 7.49,135.04 7.69,135.04 7.95,134.89 | v5.81,174.26 5.81,175.58 C28.+ | 11.04,169.23 v10.84,169.23 | v34.67,189.65 34.67,188.99 35.43,188.23 v35.43,185.18 | v36.8,191.78 36.9,191.88
  Bottom 0.61: v32.28,196.56 v20.65,196.56 | v8.96,114.92 8.96,120.15 8.61,120.51 v8.61,126.91 | v14.7,167.45 23.39,167.45 30.5,174.56 v30.6,174.56 31.01,175.37 31.01,178.93 35.43,183.35 v35.43,185.18 | v10.84,169.23 v5.81,174.26 | v9.16,149.62 v13.03,145.76 | v34.67,189.65 v36.8,191.78